# EAGLE board Trig to Gate Converter PANEL V1 (EAGLE 7.7.0)
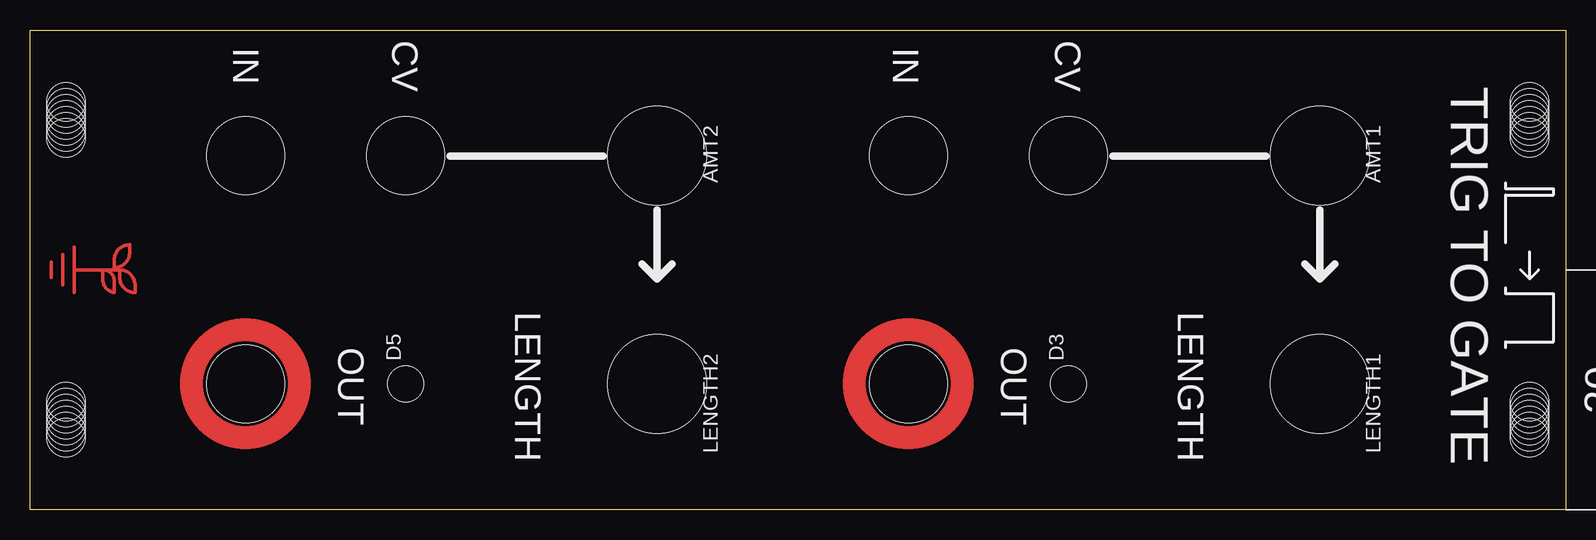
[diagram p0: board, top side]
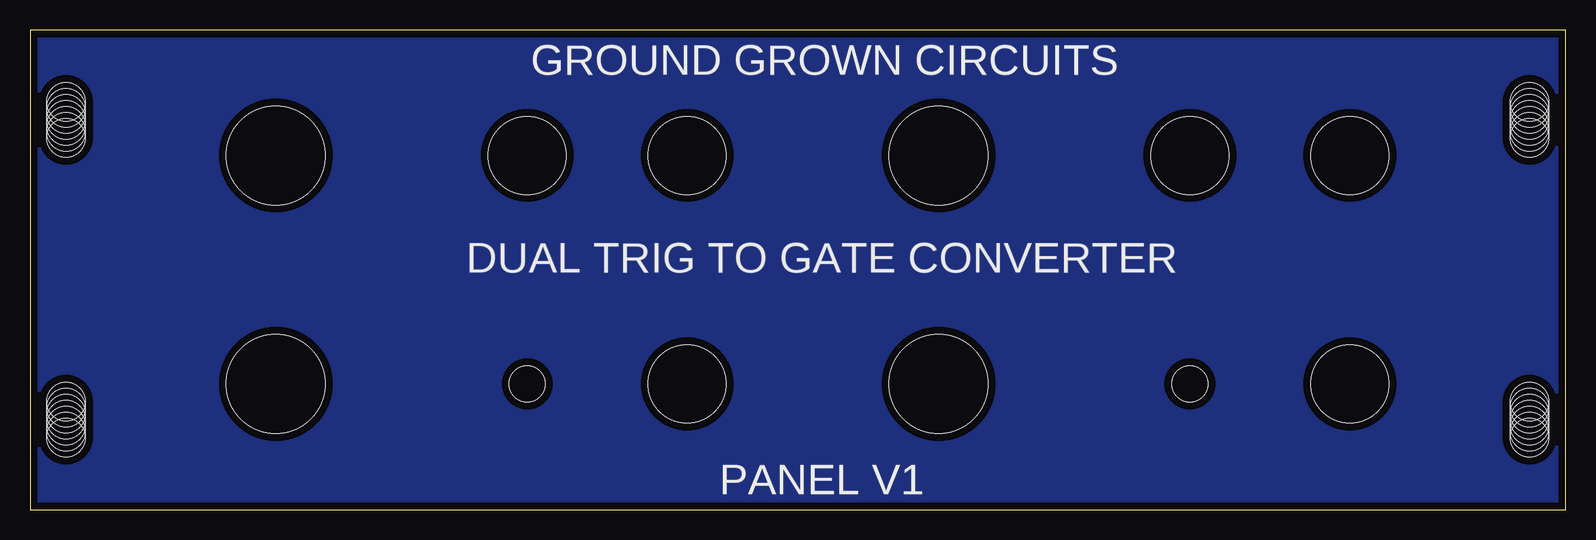
[diagram p1: board, bottom side, seen from below]

Size 128 x 40 mm. Coordinates in mm from the lower left corner, seen from the top.
Outline: 0,0 0,40 128,40 128,0 0,0
Copper layers (1*16): Top 0.035mm / dielectric 1.5mm / Bottom 0.035mm
Design rules "SparkFun": minimum track width 8mil, minimum drill 20mil, track to track 8mil, track to pad 8mil, pad to pad 8mil, via to via 8mil, smd to smd 8mil, copper to edge 8mil, drill to drill 8mil, minimum pad ring 12mil, minimum via ring 10mil, stop-mask expansion 4mil, vias tented up to drill 20mil, thermal gap 10mil

## Footprints (pad centres in the part's own frame; a part is rotated, then mirrored left to right if it is on the bottom)
POT_DRILL = hole 8.25: 0,0
JACK_DRILL = hole 6.5: 0,0
LED_3MM_DRILL = hole 3: 0,0
MOUNT_DRILL = hole 3.2: 3,9; 3,8.5; 3,8; 3,7.5; 3,7; 3,6.5; 3,6
JACK_DRILL_COPPER = hole 6.5: 0,0

## Placement (x,y rotation side)
AMT1  A100K  [POT_DRILL]  107.51,29.53 180 top
AMT2  A100K  [POT_DRILL]  52.27,29.53 180 top
CV.1  [JACK_DRILL]  86.56,29.53 0 top
CV.2  [JACK_DRILL]  31.31,29.53 0 top
D3  [LED_3MM_DRILL]  86.56,10.48 90 top
D5  [LED_3MM_DRILL]  31.31,10.48 90 top
E$1  [MOUNT_DRILL]  0,0 0 top
E$2  [MOUNT_DRILL]  128,40 180 top
E$3  [MOUNT_DRILL]  0,40 180 bottom
E$4  [MOUNT_DRILL]  128,0 0 bottom
E$5  [LOGO_SMALL_COPPER]  3.75,20 270 top
IN1  [JACK_DRILL]  73.22,29.53 0 top
IN2  [JACK_DRILL]  17.98,29.53 0 top
LENGTH1  A100K  [POT_DRILL]  107.51,10.48 180 top
LENGTH2  A100K  [POT_DRILL]  52.27,10.48 180 top
OUT1  [JACK_DRILL_COPPER]  73.22,10.48 180 top
OUT2  [JACK_DRILL_COPPER]  17.98,10.48 180 top

## Library data of the parts
AMT1 AMT2 LENGTH1 LENGTH2 = GroundGrownCircuits; PROD_ID: RES-09177
CV.1 CV.2 D3 D5 E$1-E$5 IN1 IN2 OUT1 OUT2 = GroundGrownCircuits

## Tracks (layer width: path | path; a pad name or v marks a point on that pad's centre or on a via)
S$1
  pour Bottom (isolate 0.61): 0,0 0,40 128,40 128,0

## Text on the board
tPlace: IN | CV | IN | CV | TRIG TO GATE | OUT | LENGTH | OUT | LENGTH
bPlace: GROUND GROWN CIRCUITS | DUAL TRIG TO GATE CONVERTER | PANEL V1